# Allegro board ad-drvlv1-ebz_layout.brd
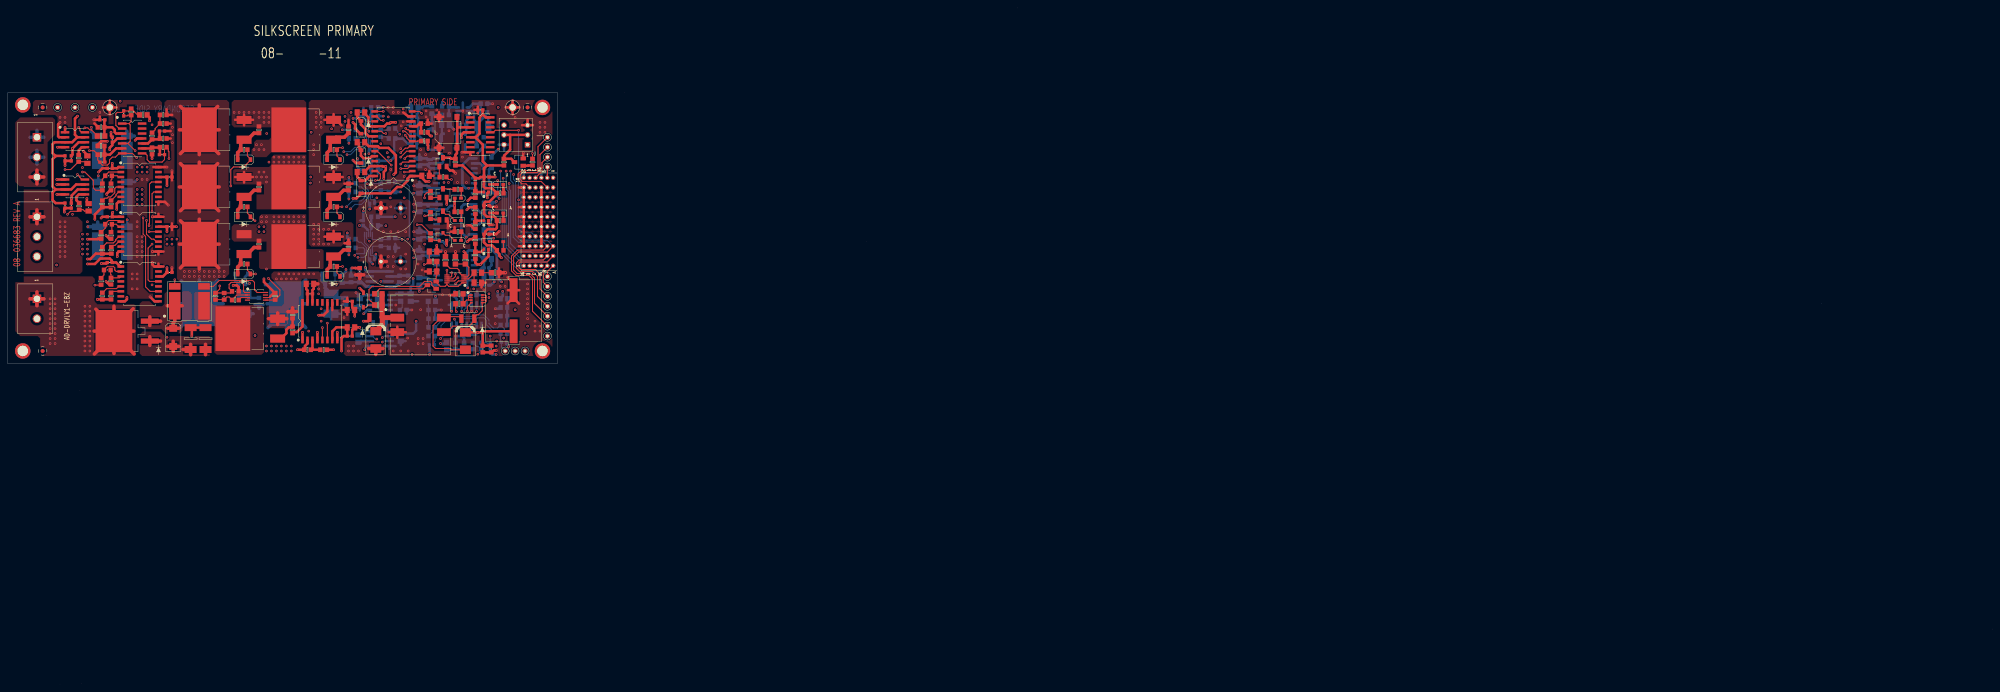
[diagram p0: board, top side]
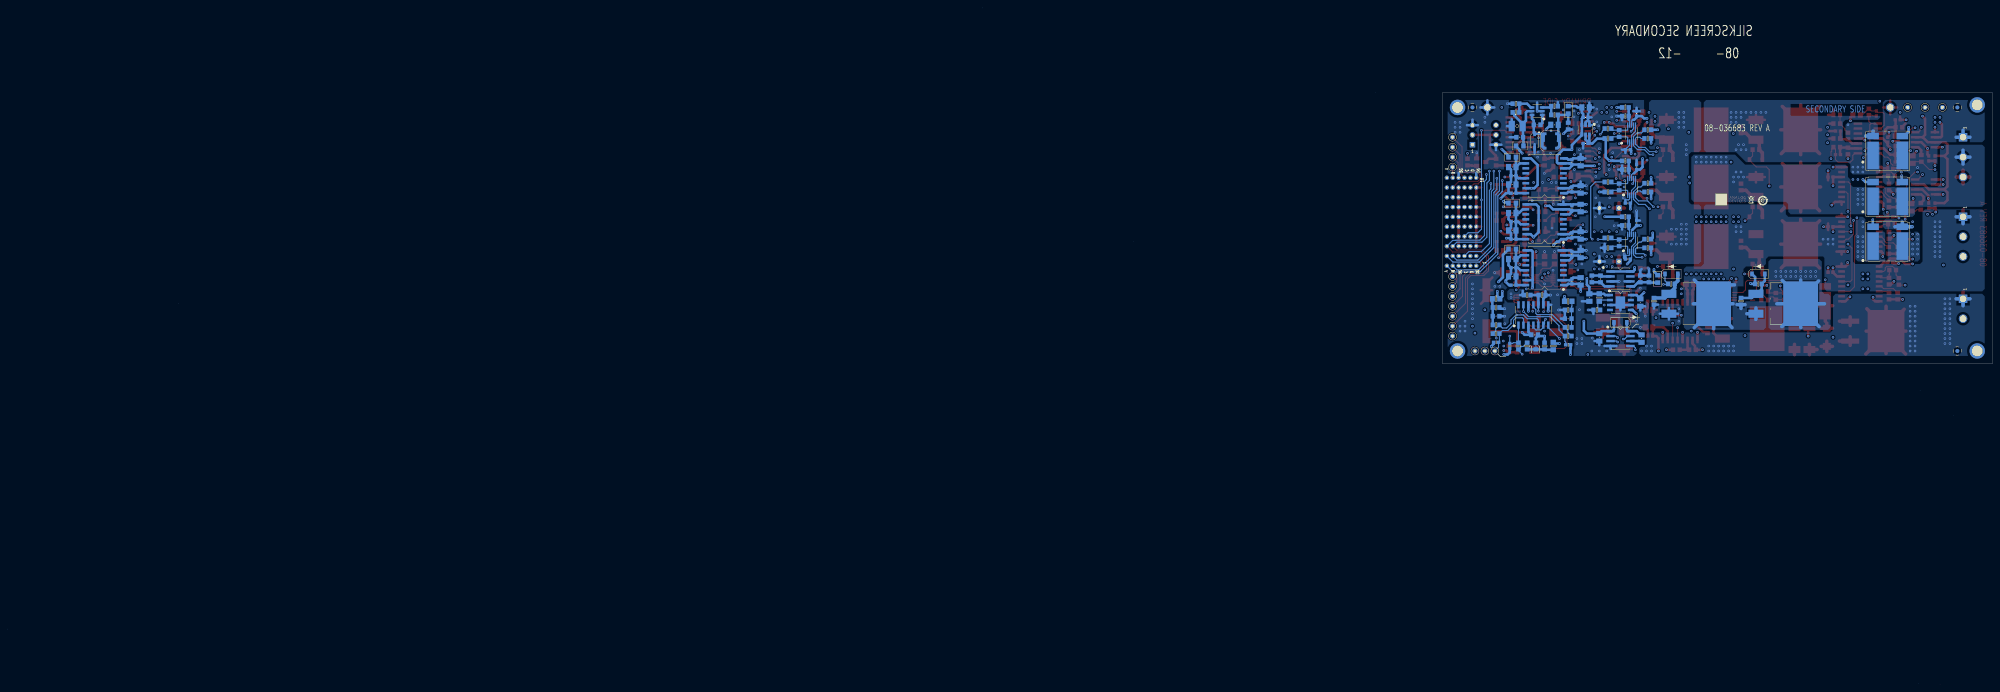
[diagram p1: board, bottom side, seen from below]

Outline 506.73 x 172.81 mm; copper layers: TOP, L2_PWR, L3_GND, L4_SIGH, L5_SIGV, L6_GND, L7_PWR, BOTTOM. Coordinates in mm from the lower left corner of the outline.
Outline path: 9.81,68.58 9.81,68.62 ; 13.32,0 13.32,0.04 ; 18.4,146.9 18.4,146.85 ; 18.42,144.15 18.42,144.19 ; 18.42,75.15 18.42,75.1 ; 18.7,0.22 18.7,0.17 ; 157.47,151.13 157.47,151.17 ; 219.2,113.16 219.2,113.2 ; 257.81,172.81 257.81,172.76 ; 463.23,97.24 463.23,97.2 ; 506.73,14.1 506.73,14.05 ; 0,151.17 0,81.83 140.31,81.83 140.31,151.17 0,151.17

## Placement (name value [footprint] x y rotation side)
A1  AD8630ARZ  [SO14]  31.75 139.42 270 top
A2  AD8251ARMZ  [RM10]  92.08 140.69 180 bottom
A3  AD8251ARMZ  [RM10]  92.08 127.04 180 bottom
A4  AD8251ARMZ  [RM10]  92.08 112.75 180 bottom
A5  ADCMP354YKSZ  [SC70_4]  122.24 126.72 0 top
A6  ADCMP354YKSZ  [SC70_4]  122.24 119.42 0 top
A7  ADCMP354YKSZ  [SC70_4]  122.24 112.12 0 top
A8  ADP1621ARMZ  [RM10]  114.3 103.55 90 top
C1  0.1UF  [C0402]  26.67 139.11 270 top
C2  0.1uF  [C0603]  106.36 143.23 0 top
C3  0.1UF  [C0402]  39.37 135.3 0 top
C4  0.1UF  [C0402]  39.37 141.33 180 top
C5  0.1UF  [C0402]  24.13 133.39 180 top
C6  0.1UF  [C0402]  29.59 145.84 270 top
C7  1UF  [C0805]  106.68 129.9 0 top
C8  0.1UF  [C0402]  24.13 144.19 0 top
C9  1UF  [C0805]  90.17 130.85 0 top
C10  1UF  [C0805]  90.17 138.47 0 top
C11  1UF  [C0805]  90.17 146.09 0 top
C12  470uF  [CPLRAD197D492H866LD24]  95.29 107.99 0 top
C13  0.1uF  [C0603]  89.85 105.45 90 top
C14  0.1UF  [C0402]  14.61 134.34 270 top
C15  0.1UF  [C0402]  16.19 134.34 90 top
C16  10UF  [C0805]  20.32 134.03 90 top
C17  0.1UF  [C0402]  14.61 122.28 270 top
C18  0.1UF  [C0402]  16.19 122.28 90 top
C19  10UF  [C0805]  20.64 121.83 90 top
C20  22NF  [C0603]  116.52 86.4 90 bottom
C21  22NF  [C0603]  126.68 94.02 180 bottom
C22  22NF  [C0603]  108.27 93.39 0 bottom
C23  0.1uF  [C0603]  116.84 89.26 0 bottom
C24  22NF  [C0603]  95.25 140.69 270 bottom
C25  22NF  [C0603]  95.25 127.04 270 bottom
C26  22NF  [C0603]  95.25 112.75 270 bottom
C27  0.1UF  [C0402]  90.81 145.77 270 bottom
C28  0.1UF  [C0402]  93.03 136.57 180 bottom
C29  0.1UF  [C0402]  90.81 132.12 270 bottom
C30  0.1UF  [C0402]  93.03 122.91 180 bottom
C31  0.1UF  [C0402]  90.81 117.83 270 bottom
C32  0.1UF  [C0402]  93.03 108.63 180 bottom
C33  0.1UF  [C0402]  122.24 129.58 180 top
C34  0.1UF  [C0402]  122.24 122.28 180 top
C35  0.1UF  [C0402]  120.65 146.73 180 top
C36  0.01UF  [C0603]  55.25 99.1 270 top
C37  0.1uF  [C0603]  58.1 100.37 0 top
C38  TBD0603  [C0603]  120.65 139.74 0 bottom
C39  10uF  [C1210]  121.29 142.6 0 bottom
C40  1UF  [C0805]  103.82 147.36 180 bottom
C41  0.1uF  [C0603]  116.21 142.92 0 bottom
C42  10UF  [C0805]  87.63 91.16 0 top
C43  0.1UF  [C0402]  103.82 144.82 180 bottom
C44  0.1UF  [C0402]  87.31 88.94 0 top
C45  10UF  [C0805]  87.63 95.61 0 top
C46  10UF  [C0805]  111.76 142.92 0 bottom
C47  0.1UF  [C0402]  87.31 97.83 0 top
C48  TBD0603  [C0603]  108.27 142.6 270 bottom
C49  10UF  [C0805]  77.15 102.28 0 top
C50  0.1UF  [C0402]  77.15 99.74 0 top
C51  TBD0603  [C0603]  102.24 103.55 270 bottom
C52  1UF  [C0805]  89.85 97.51 270 bottom
C53  2.2uF  [C0603]  100.01 103.55 270 bottom
C54  2.2uF  [C0603]  89.85 103.55 90 bottom
C55  1UF  [C0805]  102.87 98.78 270 bottom
C56  TBD0603  [C0603]  87.63 103.55 90 bottom
C57  0.1UF  [C0402]  122.24 114.98 180 top
C58  2.2uF  [C1210H87]  93.98 93.7 180 top
C59  1UF  [C0805]  108.59 110.53 180 top
C60  12pF  [C0805]  120.02 102.59 0 top
C61  1UF  [C0805]  108.59 105.45 0 top
C62  10000pF  [C0805]  120.02 105.13 0 top
C63  2.2uF  [C1210H87]  117.48 93.39 180 top
C64  470UF  [CAPSML591W531H531]  129.16 95.42 90 top
C65  0.1UF  [C0402]  103.82 138.15 0 bottom
C66  47000pF  [C0603]  25.4 105.83 0 top
C67  47000pF  [C0603]  25.72 117.52 0 top
C68  47000pF  [C0603]  25.72 129.9 0 top
C69  0.1UF  [C0402]  26.04 107.74 180 top
C70  0.1UF  [C0402]  26.04 119.42 180 top
C71  0.1UF  [C0402]  26.04 131.8 180 top
C72  0.1UF  [C0402]  41.28 105.2 0 top
C73  0.1UF  [C0402]  41.28 116.88 0 top
C74  0.1UF  [C0402]  41.28 129.58 0 top
C75  0.1UF  [C0402]  107.31 102.91 90 bottom
C76  0.1UF  [C0402]  107.31 114.66 90 bottom
C77  0.1UF  [C0402]  107.31 126.41 90 bottom
C78  10UF  [C0805]  105.09 102.91 90 bottom
C79  10UF  [C0805]  105.09 114.66 90 bottom
C80  10UF  [C0805]  105.09 126.41 90 bottom
C81  0.1UF  [C0402]  107.31 109.9 90 bottom
C82  0.1UF  [C0402]  107.31 121.64 90 bottom
C83  0.1UF  [C0402]  107.31 133.39 90 bottom
C84  10UF  [C0805]  105.09 109.9 90 bottom
C85  10UF  [C0805]  105.09 121.64 90 bottom
C86  10UF  [C0805]  105.09 133.39 90 bottom
C87  0.1UF  [C0402]  122.24 101.96 0 bottom
C88  0.1UF  [C0402]  122.24 113.71 0 bottom
C89  0.1UF  [C0402]  122.24 125.45 0 bottom
C90  10UF  [C0805]  122.56 104.18 0 bottom
C91  10UF  [C0805]  122.56 115.93 0 bottom
C92  10UF  [C0805]  122.56 127.68 0 bottom
C93  0.1UF  [C0402]  122.24 106.4 0 bottom
C94  0.1UF  [C0402]  122.24 118.15 0 bottom
C95  0.1UF  [C0402]  122.24 129.9 0 bottom
C96  10UF  [C0805]  122.56 108.63 0 bottom
C97  10UF  [C0805]  122.56 120.37 0 bottom
C98  10UF  [C0805]  122.56 132.12 0 bottom
C99  TBD0603  [C0603]  121.29 85.64 270 top
C100  TBD0603  [C0603]  123.44 85.64 270 top
C101  1UF  [C0805]  100.33 88.62 90 bottom
C102  1UF  [C0805]  89.53 88.31 90 bottom
C103  470uF  [CPLRAD197D492H866LD24]  95.29 121.64 0 top
CR1  1SMB5927BT3G  [DO214AA]  42.23 88.62 270 top
CR2  DDZ9688-7  [SOD123-3]  90.81 98.15 90 top
D1  1N4148W-7-F  [SOD123-2]  90.17 127.04 270 top
D2  1N4148W-7-F  [SOD123-2]  90.17 134.79 270 top
D3  1N4148W-7-F  [SOD123-2]  90.17 142.28 270 top
D4  1N4148W-7-F  [SOD123-2]  60.33 134.03 180 top
D5  1N4148W-7-F  [SOD123-2]  83.19 134.03 180 top
D6  1N4148W-7-F  [SOD123-2]  60.33 119.42 180 top
D7  1N4148W-7-F  [SOD123-2]  83.19 119.42 180 top
D8  1N4148W-7-F  [SOD123-2]  60.33 104.82 180 top
D9  1N4148W-7-F  [SOD123-2]  83.19 104.18 180 top
D10  1N5819HW-7-F  [SOD123-3]  116.84 138.79 270 bottom
D11  MBRS190T3G  [SMB]  116.84 87.67 270 top
D12  MBRS190T3G  [SMB]  93.98 87.99 270 top
D13  1N4148W-7-F  [SOD123-2]  59.69 104.82 180 bottom
D14  1N4148W-7-F  [SOD123-2]  81.92 104.82 180 bottom
D15  1N4148W-7-F  [SOD123-2]  94.93 92.43 0 bottom
DS1  SML-310MTT86  [LED0603]  125.73 127.68 0 top
DS2  SML-310MTT86  [LED0603]  125.73 120.37 0 top
DS3  SML-310LTT86  [LED0603]  114.94 124.18 180 top
DS4  SML-310LTT86  [LED0603]  114.94 113.39 180 top
DS5  SML-310MTT86  [LED0603]  114.94 118.47 0 top
DS6  SML-310MTT86  [LED0603]  125.73 113.07 0 top
E1  330NH  [L0805]  120.65 137.52 180 bottom
E2  330NH  [L0805]  85.41 103.55 90 bottom
E3  330NH  [L0805]  108.27 146.73 90 bottom
E4  330NH  [L0805]  122.56 111.17 0 bottom
E5  330NH  [L0805]  122.56 122.91 0 bottom
E6  330NH  [L0805]  122.56 134.66 0 bottom
L1  4.7uH  [LSMSQ154H47]  112.71 138.79 180 bottom
L2  18uH  [LSMSQ583H339]  105.41 91.8 270 top
NOREF  -  []  0 151.17 0 top
NOREF#2  -  []  153.65 148.35 0 top
NOREF#3  -  []  -0.13 81.73 0 top
NOREF#4  -  [unnamed#2]  3.82 85.14 0 top
NOREF#5  -  []  -0.08 151.25 270 top
NOREF#6  -  []  160.68 81.75 90 top
NOREF#7  -  []  -131.78 -179.03 0 top
NOREF#8  -  [unnamed#3]  8.89 85.13 0 top
NOREF#9  -  []  301.04 305.09 0 top
NOREF#10  -  []  140.31 81.83 90 top
NOREF#11  -  []  82.83 159.65 0 top
NOREF#12  -  [unnamed#2]  136.53 85.13 0 top
NOREF#13  -  []  160.6 151.87 180 top
NOREF#14  -  [unnamed#3]  132.72 147.36 0 top
NOREF#15  -  [unnamed#3]  8.89 147.36 0 top
NOREF#16  -  []  513.08 57.51 0 top
NOREF#17  -  []  -131.65 -182.2 0 top
NOREF#18  -  [unnamed#2]  3.82 148 0 top
NOREF#19  -  []  313.57 59.1 0 top
NOREF#20  -  [unnamed#2]  136.53 147.36 0 top
NOREF#21  -  [unnamed#3]  132.72 147.36 180 bottom
NOREF#22  -  [unnamed#3]  8.89 85.13 180 bottom
NOREF#23  -  []  143.53 148.07 180 bottom
NOREF#24  -  [unnamed#3]  8.89 147.36 180 bottom
NOREF#25  -  []  146.46 148.23 180 bottom
P1  691311500103  [CNHDR1X3H480]  7.44 139.74 270 top
P2  6469169-1  [CNTYCO1469169-1]  139.25 106.9 90 top
P4  691311500102  [CNHDR1X2H480]  7.44 98.47 270 top
P5  691311500103  [CNHDR1X3H480]  7.44 119.42 270 top
Q1  SI2319DS-T1-E3  [SOT23-M3]  111.12 114.34 0 top
Q2  IRFS3806PBF  [D2PAK]  53.34 141.65 90 top
Q3  IRFS3806PBF  [D2PAK]  76.2 141.65 90 top
Q4  IRFS3806PBF  [D2PAK]  53.34 127.04 90 top
Q5  IRFS3806PBF  [D2PAK]  76.2 127.04 90 top
Q6  IRFS3806PBF  [D2PAK]  53.34 112.44 90 top
Q7  IRFS3806PBF  [D2PAK]  76.2 111.8 90 top
Q8  SPB80P06P G  [PG-TO263-3]  30.48 90.21 90 top
Q9  IRFS3006TRLPBF  [D2PAK]  61.91 90.85 90 top
Q10  BSS138TA  [SOT23]  111.12 125.45 0 top
Q11  BSS138TA  [SOT23]  111.12 119.74 0 top
Q12  BSS138TA  [SOT23]  130.49 133.39 90 top
Q14  BSS138TA  [SOT23]  111.12 133.39 0 top
Q15  MMBTA06-7-F  [SOT23]  108.27 101.96 90 top
Q16  FDMC86106LZ  [MLP8_3_3X3_3]  119.76 98.47 270 top
Q17  IRFS3806PBF  [D2PAK]  53.34 97.2 270 bottom
Q18  IRFS3806PBF  [D2PAK]  75.56 97.2 270 bottom
R1  0.005  [R3637]  26.67 113.07 180 bottom
R2  0.006  [R3637]  26.67 136.25 180 bottom
R3  0.006  [R3637]  26.67 124.5 180 bottom
R4  0.005  [R3637]  46.36 97.83 0 top
R5  22  [R0603]  107.95 125.14 270 top
R6  220  [R0603]  114.94 126.41 180 top
R7  220  [R0603]  114.94 115.61 180 top
R8  22  [R0603]  107.95 114.34 90 top
R9  22  [R0603]  107.95 119.74 270 top
R10  220  [R0603]  114.94 120.69 0 top
R11  110K  [R0603]  39.69 145.46 180 top
R12  20K  [R0603]  39.69 143.23 0 top
R13  10K  [R0603]  36.83 140.06 270 top
R14  10K  [R0603]  36.83 136.25 90 top
R15  10K  [R0603]  106.36 138.79 180 top
R16  1MEG  [R0603]  106.36 141.01 180 top
R17  10K  [R0603]  39.69 139.42 0 top
R18  10K  [R0603]  39.69 137.2 0 top
R19  10K  [R0603]  31.5 146.22 90 top
R20  35.7K  [R0603]  23.81 135.3 0 top
R21  10K  [R0603]  23.81 142.28 180 top
R22  2K  [R0805]  23.81 140.06 180 top
R23  2K  [R0805]  34.61 145.46 0 top
R24  3.65K  [R0603]  23.81 137.52 180 top
R25  22  [R0603]  60.33 136.57 180 top
R26  22  [R0603]  83.19 136.57 180 top
R27  10K  [R0603]  64.14 141.65 90 top
R28  10K  [R0603]  87 141.65 90 top
R29  22  [R0603]  18.1 134.34 270 top
R30  22  [R0603]  60.33 121.96 180 top
R31  22  [R0603]  83.19 121.96 180 top
R32  10K  [R0603]  64.14 127.04 90 top
R33  10K  [R0603]  87 127.04 90 top
R34  22  [R0603]  18.22 122.09 270 top
R35  22  [R0603]  60.33 107.36 180 top
R36  22  [R0603]  83.19 106.72 180 top
R37  10K  [R0603]  64.14 112.44 90 top
R38  10K  [R0603]  87 111.8 90 top
R39  102K  [R0603]  118.75 99.42 180 bottom
R40  25.5K  [R0603]  114.94 99.42 180 bottom
R41  34.8K  [R0805]  112.08 86.4 270 bottom
R42  23.2K  [R0603]  114.3 86.4 90 bottom
R43  34.8K  [R0805]  126.68 98.47 0 bottom
R44  23.2K  [R0603]  126.68 96.24 180 bottom
R45  34.8K  [R0805]  108.27 97.83 180 bottom
R46  23.2K  [R0603]  108.27 95.61 0 bottom
R47  10K  [R0603]  118.75 86.4 90 bottom
R48  10K  [R0603]  126.68 91.8 180 bottom
R49  10K  [R0603]  108.27 91.16 0 bottom
R50  1MEG  [R0603]  120.97 86.4 90 bottom
R51  1MEG  [R0603]  126.68 89.58 180 bottom
R52  1MEG  [R0603]  108.27 88.94 0 bottom
R53  30K  [R0402]  123.19 86.4 90 bottom
R54  30K  [R0402]  126.68 87.35 180 bottom
R55  30K  [R0402]  108.27 86.72 0 bottom
R56  8.25  [R0603]  98.11 141.96 180 bottom
R57  8.25  [R0603]  98.11 128.31 180 bottom
R58  8.25  [R0603]  98.11 114.02 180 bottom
R59  8.25  [R0603]  98.11 139.42 180 bottom
R60  8.25  [R0603]  98.11 125.77 180 bottom
R61  8.25  [R0603]  98.11 111.48 180 bottom
R62  10K  [R0603]  87.95 139.42 180 bottom
R63  10K  [R0603]  87.95 125.77 180 bottom
R64  10K  [R0603]  87.95 111.48 180 bottom
R65  10K  [R0603]  87.95 141.65 180 bottom
R66  10K  [R0603]  87.95 127.99 180 bottom
R67  10K  [R0603]  87.95 113.71 180 bottom
R68  0  [R0603]  93.66 145.14 0 bottom
R69  0  [R0603]  93.66 131.49 0 bottom
R70  0  [R0603]  93.66 117.2 0 bottom
R71  0  [R0603]  93.66 147.36 0 bottom
R72  0  [R0603]  93.66 133.71 0 bottom
R73  0  [R0603]  93.66 119.42 0 bottom
R74  68.1K  [R0402]  119.38 128.63 270 top
R75  10K  [R0603]  119.38 125.14 270 top
R76  180K  [R0603]  119.38 121.01 270 top
R77  10K  [R0603]  119.38 117.2 270 top
R78  220  [R0603]  125.73 125.45 0 top
R79  180K  [R0603]  119.38 113.39 270 top
R80  22  [R0603]  133.99 133.39 270 top
R81  10K  [R0603]  126.68 133.39 90 top
R82  2K  [R2512]  46.67 88.31 90 top
R83  2K  [R2512]  50.48 88.31 90 top
R84  9.09K  [R0603]  53.02 99.1 270 top
R85  191K  [R0603]  58.1 98.15 0 top
R86  22  [R0603]  72.71 90.53 90 top
R87  100K  [R0603]  72.71 94.34 90 top
R88  4.99K  [R0603]  68.26 99.1 90 top
R89  715K  [R0603]  121.6 146.09 180 bottom
R90  100K  [R0603]  121.6 148.31 0 bottom
R91  10K  [R0603]  111.76 147.68 180 bottom
R92  3.65K  [R0603]  76.52 85.45 0 top
R93  3.65K  [R0603]  80.65 85.45 0 top
R94  53.6K  [R0603]  111.76 145.46 180 bottom
R95  118K  [R0805]  100.33 98.78 270 bottom
R96  24.9K  [R0603]  100.97 95.61 0 bottom
R97  10K  [R0603]  114.3 133.39 90 top
R99  10K  [R0603]  119.38 109.58 270 top
R100  22  [R0603]  111.12 129.58 180 top
R101  220  [R0603]  125.73 118.47 0 top
R102  220  [R0603]  125.73 110.85 0 top
R103  4.42K  [R0805]  114.3 108.31 270 top
R104  60.4K  [R0805]  111.76 108.31 90 top
R105  49.9K  [R0805]  116.84 108.31 90 top
R106  56.2K  [R0805]  94.62 96.88 180 top
R107  1  [R0805]  108.59 107.99 180 top
R108  750  [R0805]  94.62 99.74 180 top
R109  536K  [R0805]  124.46 105.13 0 top
R110  0.022  [R0805]  115.32 99.74 180 top
R111  649  [R0805]  115.32 97.2 180 top
R112  22  [R0603]  59.69 102.28 180 bottom
R113  22  [R0603]  81.92 102.28 180 bottom
R114  10K  [R0603]  64.14 97.83 270 bottom
R115  10K  [R0603]  86.36 97.83 270 bottom
R116  22  [R0603]  23.81 102.91 90 top
R117  22  [R0603]  26.35 102.97 90 top
R118  22  [R0603]  23.81 114.66 90 top
R119  22  [R0603]  26.35 114.66 90 top
R120  22  [R0603]  24.13 127.04 90 top
R121  22  [R0603]  26.35 127.04 90 top
R122  0  [R0603]  24.13 110.85 270 top
R123  0  [R0603]  24.13 122.72 270 top
R124  0  [R0603]  26.42 110.85 270 top
R125  0  [R0603]  24.13 99.16 270 top
R126  0  [R0603]  26.35 122.72 270 top
R127  0  [R0603]  26.35 99.16 270 top
S1  B3S1000  [SWB3S1000]  112.4 141.01 270 top
S2  PS-2206-L NS  [SWTHSQ315H555]  132.72 137.84 90 top
TP1  TESTPAD  [TPC50D30]  21.59 147.36 0 top
TP2  WHT  [CNLOOPTP]  26.04 147.36 0 top
TP3  TESTPAD  [TPC50D30]  17.15 147.36 0 top
TP4  WHT  [CNLOOPTP]  128.91 147.36 0 top
TP5  TESTPAD  [TPC50D30]  12.7 147.36 0 top
TP6  TESTPAD  [TPC50D30]  137.8 104.18 180 bottom
TP7  TESTPAD  [TPC50D30]  137.8 99.1 180 bottom
TP8  TESTPAD  [TPC50D30]  137.8 94.02 180 bottom
TP9  TESTPAD  [TPC50D30]  132.08 85.13 180 bottom
TP10  TESTPAD  [TPC50D30]  137.8 101.64 180 bottom
TP11  TESTPAD  [TPC50D30]  137.8 96.56 180 bottom
TP12  TESTPAD  [TPC50D30]  137.8 91.48 180 bottom
TP13  TESTPAD  [TPC50D30]  129.54 85.13 180 bottom
TP14  TESTPAD  [TPC50D30]  137.8 137.2 0 top
TP15  TESTPAD  [TPC50D30]  137.8 132.12 0 top
TP16  TESTPAD  [TPC50D30]  137.8 88.94 180 bottom
TP17  TESTPAD  [TPC50D30]  127 85.13 180 bottom
TP18  TESTPAD  [TPC50D30]  137.8 139.74 0 top
TP19  TESTPAD  [TPC50D30]  137.8 134.66 0 top
U1  IRS2336DSTRPBF  [SO28WB]  98.48 138.09 90 top
U2  AD8207WBRZ  [SO8]  17.15 139.11 270 top
U3  AD8207WBRZ  [SO8]  17.15 127.04 270 top
U4  HEF4044BT,653  [SO16]  120.65 140.38 270 top
U5  CMP04FSZ  [SO14NB-2]  117.16 94.34 180 bottom
U6  AD8214ARMZ  [MSOP8]  63.5 99.1 270 top
U7  ADP2301AUJZ  [TSOT23_6]  116.21 146.41 90 bottom
U8  ADR3425ARJZ  [SOT23_6-2]  103.82 141.65 0 bottom
U9  ADUM5230ARWZ  [SO16WB]  79.69 92.75 0 top
U10  ADP7102ARDZ  [SO8NB-PAD3_1X2_41]  94.93 97.51 270 bottom
U11  ADM660ARZ  [SO8]  94.93 103.55 270 bottom
U12  AD7401AYRWZ  [SO16WB]  33.66 102.28 270 top
U13  AD7401AYRWZ  [SO16WB]  33.66 114.98 270 top
U14  AD7401AYRWZ  [SO16WB]  33.66 127.68 270 top
U15  ADUM5000ARWZ  [SO16WB]  114.3 106.4 90 bottom
U16  ADUM5000ARWZ  [SO16WB]  114.3 118.15 90 bottom
U17  ADUM5000ARWZ  [SO16WB]  114.3 129.9 90 bottom
U18  IR2108SPBF  [SO8]  94.93 88.31 270 bottom

## Library data of the parts
A1 = AD713N: User Part Number: UPN; part number: AD713N_SM-AD8630ARZ,E006061,SO14,N/A
A2-A4 = AD8251: User Part Number: UPN; part number: AD8251_SM-AD8251ARMZ,E019018,RM10,N/A
A5-A7 = ADCMP35X: User Part Number: UPN; part number: ADCMP35X_SM-ADCMP354YKSZ,E013345,SC70_4,N/A
A8 = ADP1621: User Part Number: UPN; part number: ADP1621_SM-ADP1621ARMZ,E005374,RM10,N/A
C1 C3-C6 C8 C14 C15 C17 C18 C27-C35 C43 C44 C47 C50 C57 C65 C69-C77 C81-C83 C87-C89 C93-C95 = CAP: Tolerance: 10; User Part Number: UPN; alternate symbols: (C0402H22_ALT,C0201-2,C0402_A); part number: CAP_SM-0.1UF,16V,10,E007200,C0402; tolerance: 10
C2 C13 C23 C37 C41 = CAP: Tolerance: 10; User Part Number: UPN; alternate symbols: (C0402H22_ALT,C0201-2,C0402_A); part number: CAP_SM-0.1UF,100V,10,E013624,C0603; tolerance: 10
C7 C9-C11 C40 C52 C55 C59 C61 C101 C102 = CAP: Tolerance: 10; User Part Number: UPN; alternate symbols: (C0402H22_ALT,C0201-2,C0402_A); part number: CAP_SM-1UF,50V,10,E007202,C0805; tolerance: 10
C12 C103 = CAPP: User Part Number: UPN; Tolerance: 20; part number: CAPP_TH-470UF,63V,20,E016987,CPLRAD197D492H866LD24; tolerance: 20
C16 C19 C42 C45 C46 C49 C78-C80 C84-C86 C90-C92 C96-C98 = CAP: Tolerance: 10; User Part Number: UPN; alternate symbols: (C0402H22_ALT,C0201-2,C0402_A); part number: CAP_SM-10UF,16V,10,E006166,C0805; tolerance: 10
C20-C22 C24-C26 = CAP: Tolerance: 10; User Part Number: UPN; alternate symbols: (C0402H22_ALT,C0201-2,C0402_A); part number: CAP_SM-22NF,16V,10,E000327,C0603; tolerance: 10
C36 = CAP: Tolerance: 10; User Part Number: UPN; alternate symbols: (C0402H22_ALT,C0201-2,C0402_A); part number: CAP_SM-0.01UF,50V,10,E000421,C0603; tolerance: 10
C38 C48 C51 C56 C99 C100 = CAP: User Part Number: UPN; alternate symbols: (C0402H22_ALT,C0201-2,C0402_A); part number: CAP_SM-TBD0603,TBD0603,TBD0603,E000382,C0603
C39 = CAP: Tolerance: 10; User Part Number: UPN; alternate symbols: (C0402H22_ALT,C0201-2,C0402_A); part number: CAP_SM-10UF,25V,10,E011786,C1210; tolerance: 10
C53 C54 = CAP: Tolerance: 10; User Part Number: UPN; alternate symbols: (C0402H22_ALT,C0201-2,C0402_A); part number: CAP_SM-2.2UF,10V,10,E010426,C0603; tolerance: 10
C58 C63 = CAP: Tolerance: 10; User Part Number: UPN; alternate symbols: (C0402H22_ALT,C0201-2,C0402_A); part number: CAP_SM-2.2UF,100V,10,E015185,C1210H87; tolerance: 10
C60 = CAP: Tolerance: 5; User Part Number: UPN; alternate symbols: (C0402H22_ALT,C0201-2,C0402_A); part number: CAP_SM-12PF,50V,5,E012688,C0805; tolerance: 5
C62 = CAP: Tolerance: 10; User Part Number: UPN; alternate symbols: (C0402H22_ALT,C0201-2,C0402_A); part number: CAP_SM-10000PF,250V,10,E011672,C0805; tolerance: 10
C64 = CAPP: Tolerance: 20; User Part Number: UPN; part number: CAPP_SM-470UF,35V,20,E006570,CAPSML591W531H531; tolerance: 20
C66-C68 = CAP: Tolerance: 5; User Part Number: UPN; alternate symbols: (C0402H22_ALT,C0201-2,C0402_A); part number: CAP_SM-47000PF,25V,5,E012692,C0603; tolerance: 5
CR1 = DIOZNR: User Part Number: UPN; Tolerance: N/A; part number: DIOZNR_SM-1SMB5927BT3G,12V,N/A,E006923,DO214AA; tolerance: N/A
CR2 = DIOZNR: Tolerance: 5; User Part Number: UPN; part number: DIOZNR_SM-DDZ9688-7,4.7V,5,E019172,SOD123-3; tolerance: 5
D1-D9 D13-D15 = DIO: User Part Number: UPN; Tolerance: N/A; part number: DIO_SM-1N4148W-7-F,100V,N/A,E018902,SOD123-2; tolerance: N/A
D10 = DIOSCHOTTKY: Tolerance: N/A; User Part Number: UPN; part number: DIOSCHOTTKY_SM-1N5819HW-7-F,40V,N/A,E014276,SOD123-3; tolerance: N/A
D11 D12 = DIOSCHOTTKY: User Part Number: UPN; Tolerance: N/A; part number: DIOSCHOTTKY_SM-MBRS190T3G,90V,N/A,E019177,SMB; tolerance: N/A
DS1 DS2 DS5 DS6 = DIOLED: Tolerance: N/A; User Part Number: UPN; part number: DIOLED_SM-SML-310MTT86,2.8V,N/A,E001179,LED0603; tolerance: N/A
DS3 DS4 = DIOLED: Tolerance: N/A; User Part Number: UPN; part number: DIOLED_SM-SML-310LTT86,2.5V,N/A,E001178,LED0603; tolerance: N/A
E1-E6 = FERRITE: Tolerance: 5; User Part Number: UPN; part number: FERRITE_SM-330NH,5,E002351,L0805; tolerance: 5
L1 = IND: Tolerance: 20; User Part Number: UPN; alternate symbols: (L0402-2,L0603_ALT); part number: IND_SM-4.7UH,20,E017961,LSMSQ154H47; tolerance: 20
L2 = IND_4P_V4: Tolerance: 20; User Part Number: UPN; part number: IND_4P_V4_SM-18UH,20,E019170,LSMSQ583H339; tolerance: 20
P1 P5 = CN3P: User Part Number: UPN; part number: CN3P_TH-691311500103,E019197,CNHDR1X3H480
P2 = CNTYCO60P: User Part Number: UPN; part number: CNTYCO60P_TH-6469169-1,E006097,CNTYCO1469169-1
P4 = CN2P: User Part Number: UPN; part number: CN2P_TH-691311500102,E019196,CNHDR1X2H480
Q1 = TRANSI2301DS: User Part Number: UPN; part number: TRANSI2301DS_SM-SI2319DS-T1-E3,E017810,SOT23-M3
Q2-Q7 Q17 Q18 = TRANNMOSFET_V18: User Part Number: UPN; part number: TRANNMOSFET_V18_SM-IRFS3806PBF,E019009,D2PAK
Q8 = TRANPMOSFET_V11: User Part Number: UPN; part number: TRANPMOSFET_V11_SM-SPB80P06P G,E019087,PG-TO263-3
Q9 = TRANNMOSFET_V18: User Part Number: UPN; part number: TRANNMOSFET_V18_SM-IRFS3006TRLPBF,E019017,D2PAK
Q10-Q12 Q14 = TRANBSS138: User Part Number: UPN; part number: TRANBSS138_SM-BSS138TA,E004635,SOT23
Q15 = TRANNPN_V2: User Part Number: UPN; part number: TRANNPN_V2_SM-MMBTA06-7-F,E019171,SOT23
Q16 = TRANNMOSFET_V9: User Part Number: UPN; Tolerance: 100V; part number: TRANNMOSFET_V9_SM-FDMC86106LZ,E017648,MLP8_3_3X3_3; tolerance: 100V
R1 R4 = RES4PKEL: Tolerance: 1; User Part Number: UPN; alternate symbols: (TO220-4); part number: RES4PKEL_SM-0.005,3W,1,E019084,R3637; tolerance: 1
R2 R3 = RES4PKEL: Tolerance: 1; User Part Number: UPN; alternate symbols: (TO220-4); part number: RES4PKEL_SM-0.006,3W,1,E019127,R3637; tolerance: 1
R5 R8 R9 R25 R26 R29-R31 R34-R36 R80 R86 R100 R112 R113 R116-R121 = RES: Tolerance: 1; User Part Number: UPN; alternate symbols: (RRAD984L1500W75H520LD32;TO220H590_ALT;R0402_A); part number: RES_SM-22,1/16W,1,E004223,R0603; tolerance: 1
R6 R7 R10 R78 R101 R102 = RES: Tolerance: 1; User Part Number: UPN; alternate symbols: (RRAD984L1500W75H520LD32;TO220H590_ALT;R0402_A); part number: RES_SM-220,1/16W,1,E004222,R0603; tolerance: 1
R11 = RES: Tolerance: 1; User Part Number: UPN; alternate symbols: (RRAD984L1500W75H520LD32;TO220H590_ALT;R0402_A); part number: RES_SM-110K,1/10W,1,E014719,R0603; tolerance: 1
R12 = RES: Tolerance: 1; User Part Number: UPN; alternate symbols: (RRAD984L1500W75H520LD32;TO220H590_ALT;R0402_A); part number: RES_SM-20K,1/10W,1,E017927,R0603; tolerance: 1
R13-R15 R17 R18 R27 R28 R32 R33 R37 R38 R47-R49 R62-R67 R75 R77 R81 R91 R97 R99 R114 R115 = RES: Tolerance: 1; User Part Number: UPN; alternate symbols: (RRAD984L1500W75H520LD32;TO220H590_ALT;R0402_A); part number: RES_SM-10K,1/10W,1,E003671,R0603; tolerance: 1
R16 R50-R52 = RES: Tolerance: 1; User Part Number: UPN; alternate symbols: (RRAD984L1500W75H520LD32;TO220H590_ALT;R0402_A); part number: RES_SM-1MEG,1/10W,1,E003682,R0603; tolerance: 1
R19 R21 = RES: Tolerance: 0.1; User Part Number: UPN; alternate symbols: (RRAD984L1500W75H520LD32;TO220H590_ALT;R0402_A); part number: RES_SM-10K,1/16W,0.1,E003965,R0603; tolerance: 0.1
R20 = RES: Tolerance: 1; User Part Number: UPN; alternate symbols: (RRAD984L1500W75H520LD32;TO220H590_ALT;R0402_A); part number: RES_SM-35.7K,1/10W,1,E016592,R0603; tolerance: 1
R22 R23 = RES: Tolerance: 0.1; User Part Number: UPN; alternate symbols: (RRAD984L1500W75H520LD32;TO220H590_ALT;R0402_A); part number: RES_SM-2K,1/8W,0.1,E016846,R0805; tolerance: 0.1
R24 R92 R93 = RES: Tolerance: 1; User Part Number: UPN; alternate symbols: (RRAD984L1500W75H520LD32;TO220H590_ALT;R0402_A); part number: RES_SM-3.65K,1/10W,1,E003679,R0603; tolerance: 1
R39 = RES: Tolerance: 1; User Part Number: UPN; alternate symbols: (RRAD984L1500W75H520LD32;TO220H590_ALT;R0402_A); part number: RES_SM-102K,1/10W,1,E014965,R0603; tolerance: 1
R40 = RES: Tolerance: 1; User Part Number: UPN; alternate symbols: (RRAD984L1500W75H520LD32;TO220H590_ALT;R0402_A); part number: RES_SM-25.5K,1/10W,1,E011039,R0603; tolerance: 1
R41 R43 R45 = RES: Tolerance: 0.1; User Part Number: UPN; alternate symbols: (RRAD984L1500W75H520LD32;TO220H590_ALT;R0402_A); part number: RES_SM-34.8K,1/10W,0.1,E010465,R0805; tolerance: 0.1
R42 R44 R46 = RES: Tolerance: 1; User Part Number: UPN; alternate symbols: (RRAD984L1500W75H520LD32;TO220H590_ALT;R0402_A); part number: RES_SM-23.2K,1/10W,1,E013527,R0603; tolerance: 1
R53-R55 = RES: Tolerance: 1; User Part Number: UPN; alternate symbols: (RRAD984L1500W75H520LD32;TO220H590_ALT;R0402_A); part number: RES_SM-30K,1/16W,1,E003792,R0402; tolerance: 1
R56-R61 = RES: Tolerance: 1; User Part Number: UPN; alternate symbols: (RRAD984L1500W75H520LD32;TO220H590_ALT;R0402_A); part number: RES_SM-8.25,1/16W,1,E019135,R0603; tolerance: 1
R68-R73 R122-R127 = RES: Tolerance: 5; User Part Number: UPN; alternate symbols: (RRAD984L1500W75H520LD32;TO220H590_ALT;R0402_A); part number: RES_SM-0,1/10W,5,E006826,R0603; tolerance: 5
R74 = RES: Tolerance: 1; User Part Number: UPN; alternate symbols: (RRAD984L1500W75H520LD32;TO220H590_ALT;R0402_A); part number: RES_SM-68.1K,1/10W,1,E014436,R0402; tolerance: 1
R76 R79 = RES: Tolerance: 1; User Part Number: UPN; alternate symbols: (RRAD984L1500W75H520LD32;TO220H590_ALT;R0402_A); part number: RES_SM-180K,1/10W,1,E013305,R0603; tolerance: 1
R82 R83 = RES: Tolerance: 1; User Part Number: UPN; alternate symbols: (RRAD984L1500W75H520LD32;TO220H590_ALT;R0402_A); part number: RES_SM-2K,1W,1,E016447,R2512; tolerance: 1
R84 = RES: Tolerance: 1; User Part Number: UPN; alternate symbols: (RRAD984L1500W75H520LD32;TO220H590_ALT;R0402_A); part number: RES_SM-9.09K,1/10W,1,E003703,R0603; tolerance: 1
R85 = RES: Tolerance: 1; User Part Number: UPN; alternate symbols: (RRAD984L1500W75H520LD32;TO220H590_ALT;R0402_A); part number: RES_SM-191K,1/10W,1,E018406,R0603; tolerance: 1
R87 R90 = RES: Tolerance: 1; User Part Number: UPN; alternate symbols: (RRAD984L1500W75H520LD32;TO220H590_ALT;R0402_A); part number: RES_SM-100K,1/10W,1,E010279,R0603; tolerance: 1
R88 = RES: Tolerance: 1; User Part Number: UPN; alternate symbols: (RRAD984L1500W75H520LD32;TO220H590_ALT;R0402_A); part number: RES_SM-4.99K,1/10W,1,E003726,R0603; tolerance: 1
R89 = RES: Tolerance: 1; User Part Number: UPN; alternate symbols: (RRAD984L1500W75H520LD32;TO220H590_ALT;R0402_A); part number: RES_SM-715K,1/10W,1,E019109,R0603; tolerance: 1
R94 = RES: Tolerance: 0.1; User Part Number: UPN; alternate symbols: (RRAD984L1500W75H520LD32;TO220H590_ALT;R0402_A); part number: RES_SM-53.6K,1/10W,0.1,E018889,R0603; tolerance: 0.1
R95 = RES: Tolerance: 1; User Part Number: UPN; alternate symbols: (RRAD984L1500W75H520LD32;TO220H590_ALT;R0402_A); part number: RES_SM-118K,1/8W,1,E014053,R0805; tolerance: 1
R96 = RES: Tolerance: 0.5; User Part Number: UPN; alternate symbols: (RRAD984L1500W75H520LD32;TO220H590_ALT;R0402_A); part number: RES_SM-24.9K,1/16W,0.5,E011717,R0603; tolerance: 0.5
R103 = RES: Tolerance: 1; User Part Number: UPN; alternate symbols: (RRAD984L1500W75H520LD32;TO220H590_ALT;R0402_A); part number: RES_SM-4.42K,1/8W,1,E003580,R0805; tolerance: 1
R104 = RES: Tolerance: 1; User Part Number: UPN; alternate symbols: (RRAD984L1500W75H520LD32;TO220H590_ALT;R0402_A); part number: RES_SM-60.4K,1/8W,1,E003582,R0805; tolerance: 1
R105 = RES: Tolerance: 1; User Part Number: UPN; alternate symbols: (RRAD984L1500W75H520LD32;TO220H590_ALT;R0402_A); part number: RES_SM-49.9K,1/8W,1,E003486,R0805; tolerance: 1
R106 = RES: Tolerance: 1; User Part Number: UPN; alternate symbols: (RRAD984L1500W75H520LD32;TO220H590_ALT;R0402_A); part number: RES_SM-56.2K,1/8W,1,E014917,R0805; tolerance: 1
R107 = RES: User Part Number: UPN; alternate symbols: (RRAD984L1500W75H520LD32;TO220H590_ALT;R0402_A); part number: RES_SM-1,1/10W,1,E003556,R0805
R108 = RES: Tolerance: 1; User Part Number: UPN; alternate symbols: (RRAD984L1500W75H520LD32;TO220H590_ALT;R0402_A); part number: RES_SM-750,1/8W,1,E003489,R0805; tolerance: 1
R109 = RES: Tolerance: 1; User Part Number: UPN; alternate symbols: (RRAD984L1500W75H520LD32;TO220H590_ALT;R0402_A); part number: RES_SM-536K,1/8W,1,E003548,R0805; tolerance: 1
R110 = RES: Tolerance: 1; User Part Number: UPN; alternate symbols: (RRAD984L1500W75H520LD32;TO220H590_ALT;R0402_A); part number: RES_SM-0.022,1/4W,1,E006394,R0805; tolerance: 1
R111 = RES: Tolerance: 1; User Part Number: UPN; alternate symbols: (RRAD984L1500W75H520LD32;TO220H590_ALT;R0402_A); part number: RES_SM-649,1/8W,1,E003634,R0805; tolerance: 1
S1 = SWSPST4PIN: User Part Number: UPN; part number: SWSPST4PIN_SM-B3S1000,E004572,SWB3S1000
S2 = SWDPDT_V6: User Part Number: UPN; part number: SWDPDT_V6_TH-PS-2206-L NS,E019143,SWTHSQ315H555
TP1 TP3 TP5-TP19 = NCTESTPAD: User Part Number: UPN; part number: NCTESTPAD_TH-TESTPAD,E007450,TPC50D30
TP2 TP4 = CNTP1P: User Part Number: UPN; alternate symbols: (CNBANANA_ALT); part number: CNTP1P_TH-WHT,E000946,CNLOOPTP
U1 = ICIRS2336D: User Part Number: UPN; part number: ICIRS2336D_SM-IRS2336DSTRPBF,E019006,SO28WB
U2 U3 = AD8207: User Part Number: UPN; part number: AD8207_SM-AD8207WBRZ,E018999,SO8,N/A
U4 = ICHEF4044B: User Part Number: UPN; part number: ICHEF4044B_SM-HEF4044BT,653,E019110,SO16
U5 = CMP04: User Part Number: UPN; part number: CMP04_SM-CMP04FSZ,E018278,SO14NB-2,N/A
U6 = AD8214: User Part Number: UPN; part number: AD8214_SM-AD8214ARMZ,E018997,MSOP8,N/A
U7 = ADP2301: User Part Number: UPN; part number: ADP2301_SM-ADP2301AUJZ,E007310,TSOT23_6,N/A
U8 = ADR34XX: User Part Number: UPN; part number: ADR34XX_SM-ADR3425ARJZ,E014189,SOT23_6-2,N/A
U9 = ADUM5230: User Part Number: UPN; part number: ADUM5230_SM-ADUM5230ARWZ,E019024,SO16WB,N/A
U10 = ADP7102: User Part Number: UPN; part number: ADP7102_SM-ADP7102ARDZ,E017712,SO8NB-PAD3_1X2_41,N/A
U11 = ADM660: User Part Number: UPN; part number: ADM660_TH-ADM660ARZ,E006022,SO8,N/A
U12-U14 = AD7401: User Part Number: UPN; part number: AD7401_SM-AD7401AYRWZ,E017532,SO16WB,N/A
U15-U17 = ADUM5000: User Part Number: UPN; part number: ADUM5000_SM-ADUM5000ARWZ,E018875,SO16WB,N/A
U18 = ICIR2108: User Part Number: UPN; part number: ICIR2108_SM-IR2108SPBF,E019253,SO8

## Footprints (pads in the part's own frame, mm; a bottom-side part is the same pattern mirrored in y, then rotated)
C0402
  rect 0.889x0.813 smd: 1(-0.635,0) 2(0.635,0)
C0603
  rect 1.092x1.194 smd: 1(-0.851,0) 2(0.851,0)
C0805
  rect 1.295x1.6 smd: 1(-0.953,0) 2(0.953,0)
C1210
  rect 1.575x2.692 smd: 1(-1.397,0) 2(1.397,0)
C1210H87
  rect 1.092x2.21 smd: 1(-1.646,0) 2(1.646,0)
CAPSML591W531H531
  rect 6.096x2.032 smd: N(5.248,0) P(-5.248,0)
CNHDR1X2H480
  rect 2.159x2.159 hole 1.651: 1(0,0)
  round 2.159 hole 1.651: 2(5.08,0)
CNHDR1X3H480
  rect 2.159x2.159 hole 1.651: 1(0,0)
  round 2.159 hole 1.651: 2(5.08,0) 3(10.16,0)
CNLOOPTP
  round 2.159 hole 1.6: 1(0,0)
CNTYCO1469169-1
  round 1.118 hole 0.61: A1(0,0) A2(2.5,0) A3(5,0) A4(7.5,0) A5(10,0) A6(12.5,0) A7(15,0) A8(17.5,0) A9(20,0) A10(22.5,0) B1(0,1.5) B2(2.5,1.5) B3(5,1.5) B4(7.5,1.5) B5(10,1.5) B6(12.5,1.5) B7(15,1.5) B8(17.5,1.5) B9(20,1.5) B10(22.5,1.5) BG1(0,3) BG2(2.5,3) BG3(5,3) BG4(7.5,3) BG5(10,3) BG6(12.5,3) BG7(15,3) BG8(17.5,3) BG9(20,3) BG10(22.5,3) C1(0,4.5) C2(2.5,4.5) C3(5,4.5) C4(7.5,4.5) C5(10,4.5) C6(12.5,4.5) C7(15,4.5) C8(17.5,4.5) C9(20,4.5) C10(22.5,4.5) D1(0,6) D2(2.5,6) D3(5,6) D4(7.5,6) D5(10,6) D6(12.5,6) D7(15,6) D8(17.5,6) D9(20,6) D10(22.5,6) DG1(0,7.5) DG2(2.5,7.5) DG3(5,7.5) DG4(7.5,7.5) DG5(10,7.5) DG6(12.5,7.5) DG7(15,7.5) DG8(17.5,7.5) DG9(20,7.5) DG10(22.5,7.5)
CPLRAD197D492H866LD24
  round 1.397 hole 0.889: N(5,0)
  rect 1.397x1.397 hole 0.889: P(0,0)
D2PAK
  rect 2.083x3.81 smd: 1(-2.54,-6.985) 3(2.54,-6.985)
  rect 11.43x8.89 smd: 4(0,4.445)
DO214AA
  rect 1.778x2.032 smd: A(2.311,0) C(-2.311,0)
L0805
  rect 1.143x1.27 smd: 1(-0.953,0) 2(0.953,0)
LED0603
  rect 0.965x0.762 smd: A(0.8,0) C(-0.8,0)
LSMSQ154H47
  custom 1.448x4.394 smd: 1(-1.829,0) 2(1.829,0)
LSMSQ583H339
  rect 2.007x3.505 smd: 1(-1.854,-5.956) 2(1.854,-5.956) 3(1.854,5.956) 4(-1.854,5.956)
MLP8_3_3X3_3
  rect 0.432x0.711 smd: 1(-0.975,-1.394) 2(-0.325,-1.394) 3(0.325,-1.394) 4(0.975,-1.394) 5(0.975,1.394) 6(0.325,1.394) 7(-0.325,1.394) 8(-0.975,1.394)
MSOP8
  rect 0.305x1.321 smd: 1(-0.975,-2.3) 2(-0.325,-2.3) 3(0.325,-2.3) 4(0.975,-2.3) 5(0.975,2.3) 6(0.325,2.3) 7(-0.325,2.3) 8(-0.975,2.3)
PG-TO263-3
  rect 1.346x4.597 smd: 1(-2.54,-5.779) 3(2.54,-5.779)
  rect 10.795x9.398 smd: 4(0,3.378)
R0402
  rect 0.889x0.813 smd: 1(-0.635,0) 2(0.635,0)
R0603
  rect 1.092x1.194 smd: 1(-0.851,0) 2(0.851,0)
R0805
  rect 1.295x1.397 smd: 1(-0.953,0) 2(0.953,0)
R2512
  rect 1.778x3.048 smd: 1(-2.794,0) 2(2.794,0)
R3637
  rect 2.946x1.676 smd: 1(-3.734,3.81) 3(3.734,3.81)
  rect 2.946x7.01 smd: 2(-3.734,-1.143) 4(3.734,-1.143)
RM10
  rect 0.305x1.321 smd: 1(-1,-2.171) 2(-0.5,-2.171) 3(0,-2.171) 4(0.5,-2.171) 5(1,-2.171) 6(1,2.171) 7(0.5,2.171) 8(0,2.171) 9(-0.5,2.171) 10(-1,2.171)
SC70_4
  rect 0.356x0.787 smd: 1(-0.65,-0.98) 3(0.65,0.98) 4(-0.65,0.98)
  rect 0.762x0.787 smd: 2(0.5,-0.98)
SMB
  rect 2.159x2.794 smd: A(2.223,0) C(-2.223,0)
SO8
  rect 0.61x2.184 smd: 1(-1.905,-2.54) 2(-0.635,-2.54) 3(0.635,-2.54) 4(1.905,-2.54) 5(1.905,2.54) 6(0.635,2.54) 7(-0.635,2.54) 8(-1.905,2.54)
SO8NB-PAD3_1X2_41
  rect 0.635x1.524 smd: 1(-1.905,-2.667) 2(-0.635,-2.667) 3(0.635,-2.667) 4(1.905,-2.667) 5(1.905,2.667) 6(0.635,2.667) 7(-0.635,2.667) 8(-1.905,2.667)
  rect 3.099x2.413 smd: PAD(0,0)
SO14
  rect 0.61x2.184 smd: 1(-3.81,-2.54) 2(-2.54,-2.54) 3(-1.27,-2.54) 4(0,-2.54) 5(1.27,-2.54) 6(2.54,-2.54) 7(3.81,-2.54) 8(3.81,2.54) 9(2.54,2.54) 10(1.27,2.54) 11(0,2.54) 12(-1.27,2.54) 13(-2.54,2.54) 14(-3.81,2.54)
SO14NB-2
  rect 0.635x1.829 smd: 1(-3.81,-2.591) 2(-2.54,-2.591) 3(-1.27,-2.591) 4(0,-2.591) 5(1.27,-2.591) 6(2.54,-2.591) 7(3.81,-2.591) 8(3.81,2.591) 9(2.54,2.591) 10(1.27,2.591) 11(0,2.591) 12(-1.27,2.591) 13(-2.54,2.591) 14(-3.81,2.591)
SO16
  rect 0.61x2.184 smd: 1(-4.445,-2.54) 2(-3.175,-2.54) 3(-1.905,-2.54) 4(-0.635,-2.54) 5(0.635,-2.54) 6(1.905,-2.54) 7(3.175,-2.54) 8(4.445,-2.54) 9(4.445,2.54) 10(3.175,2.54) 11(1.905,2.54) 12(0.635,2.54) 13(-0.635,2.54) 14(-1.905,2.54) 15(-3.175,2.54) 16(-4.445,2.54)
SO16WB
  rect 0.635x1.727 smd: 1(-4.445,-4.801) 2(-3.175,-4.801) 3(-1.905,-4.801) 4(-0.635,-4.801) 5(0.635,-4.801) 6(1.905,-4.801) 7(3.175,-4.801) 8(4.445,-4.801) 9(4.445,4.801) 10(3.175,4.801) 11(1.905,4.801) 12(0.635,4.801) 13(-0.635,4.801) 14(-1.905,4.801) 15(-3.175,4.801) 16(-4.445,4.801)
SO28WB
  rect 0.635x1.727 smd: 1(-8.255,-4.788) 2(-6.985,-4.788) 3(-5.715,-4.788) 4(-4.445,-4.788) 5(-3.175,-4.788) 6(-1.905,-4.788) 7(-0.635,-4.788) 8(0.635,-4.788) 9(1.905,-4.788) 10(3.175,-4.788) 11(4.445,-4.788) 12(5.715,-4.788) 13(6.985,-4.788) 14(8.255,-4.788) 15(8.255,4.788) 16(6.985,4.788) 17(5.715,4.788) 18(4.445,4.788) 19(3.175,4.788) 20(1.905,4.788) 21(0.635,4.788) 22(-0.635,4.788) 23(-1.905,4.788) 24(-3.175,4.788) 25(-4.445,4.788) 26(-5.715,4.788) 27(-6.985,4.788) 28(-8.255,4.788)
SOD123-2
  rect 0.914x1.219 smd: A(1.638,0) C(-1.638,0)
SOD123-3
  rect 1.194x0.711 smd: A(1.847,0) C(-1.847,0)
SOT23
  rect 1.016x1.397 smd: 1(-0.94,-1.118) 2(0.94,-1.118) 3(0,1.118)
SOT23-M3
  rect 0.787x0.889 smd: 1(-0.94,-1.003) 2(0.94,-1.003) 3(0,1.003)
SOT23_6-2
  rect 0.711x0.991 smd: 1(-0.95,-1.2) 2(0,-1.2) 3(0.95,-1.2) 4(0.95,1.2) 5(0,1.2) 6(-0.95,1.2)
SWB3S1000
  rect 1.524x1.27 smd: 1(3.937,-2.286) 2(-3.937,-2.286) 3(3.937,2.286) 4(-3.937,2.286)
SWTHSQ315H555
  rect 1.397x1.397 hole 0.889: 1(0,0)
  round 1.397 hole 0.889: 2(2.5,0) 3(5,0) 4(0,6) 5(2.5,6) 6(5,6)
TPC50D30
  round 1.27 hole 0.762: 1(0,0)
TSOT23_6
  rect 0.61x1.219 smd: 1(-0.95,-1.31) 2(0,-1.31) 3(0.95,-1.31) 4(0.95,1.31) 5(0,1.31) 6(-0.95,1.31)
unnamed#2
  round 3.937 hole 2.667 unplated: (0,0)
unnamed#3
  round 1.016 smd: (0,0)

## Nets
2V5_REF: C14.1(N1) C17.1(N1) C65.1(N1) R59.1(N1) R60.1(N1) R71.2(N2) R72.2(N2) R73.2(N2) U2.3(VREF2) U2.7(VREF1) U3.3(VREF2) U3.7(VREF1) U8.5(VOUT_SENSE) U8.6(VOUT_FORCE)
5V0: A1.4(V+) A5.4(VCC) A6.4(VCC) A7.4(VCC) C1.2(N2) C15.2(N2) C18.2(N2) C33.2(N2) C34.2(N2) C35.1(N1) C40.1(N1) C42.1(N1) C43.1(N1) C44.1(N1) C57.2(N2) C72.1(N1) C73.1(N1) C74.1(N1) C75.1(N1) C76.1(N1) C77.1(N1) C78.1(N1) C79.1(N1) C80.1(N1) C81.1(N1) C82.1(N1) C83.1(N1) C84.1(N1) C85.1(N1) C86.1(N1) DS3.A(P) E3.2(N2) Q1.2(S) R10.1(N1) R15.1(N1) R53.1(N1) R54.1(N1) R55.1(N1) R74.1(N1) R78.1(N1) R81.1(N1) R92.1(N1) R97.1(N1) R101.1(N1) R102.1(N1) U2.6(V+) U3.6(V+) U4.5(OE) U4.16(VDD) U8.3(ENABLE) U8.4(VIN) U9.2(VDD1_1) U9.7(VDD1_2) U12.14(VDD2) U13.14(VDD2) U14.14(VDD2) U15.1(VDD1_1) U15.6(RCSEL) U15.7(VDD1_2) U16.1(VDD1_1) U16.6(RCSEL) U16.7(VDD1_2) U17.1(VDD1_1) U17.6(RCSEL) U17.7(VDD1_2)
5V0_ISO_A: C69.1(N1) E4.2(N2) R125.2(N2) R127.2(N2) U12.1(VDD1)
5V0_ISO_B: C70.1(N1) E5.2(N2) R122.2(N2) R124.2(N2) U13.1(VDD1)
5V0_ISO_T: C71.1(N1) E6.2(N2) R123.2(N2) R126.2(N2) U14.1(VDD1)
7V0: A2.8(+VS) A3.8(+VS) A4.8(+VS) C27.2(N2) C29.2(N2) C31.2(N2) C55.1(N1) R95.1(N1) U10.1(VOUT) U11.1(FC) U11.8(V+)
15V0: C7.1(N1) C23.2(N2) C45.1(N1) C47.1(N1) C52.1(N1) C64.P(N1) C99.1(N1) C100.1(N1) C101.2(N2) D1.A(P) D2.A(P) D3.A(P) D11.C(N) D15.A(P) E1.1(N1) R16.1(N1) R76.1(N1) R105.2(N2) U1.1(VCC) U5.3(V+) U9.10(VDDB) U10.5(EN_UVLO) U10.8(VIN) U18.1(VCC)
-7V0: A2.3(-VS) A2.6(WR_N) A3.3(-VS) A3.6(WR_N) A4.3(-VS) A4.6(WR_N) C28.2(N2) C30.2(N2) C32.2(N2) E2.2(N2)
AGND: A1.11(V-) A2.2(DGND) A3.2(DGND) A4.2(DGND) A5.2(GND) A6.2(GND) A7.2(GND) A8.2(GND) A8.6(PGND) C1.1(N1) C2.2(N2) C4.1(N1) C7.2(N2) C8.1(N1) C12.N(N2) C13.2(N2) C14.2(N2) C15.1(N1) C16.2(N2) C17.2(N2) C18.1(N1) C19.2(N2) C20.2(N2) C21.2(N2) C22.2(N2) C23.1(N1) C27.1(N1) C28.1(N1) C29.1(N1) C30.1(N1) C31.1(N1) C32.1(N1) C33.1(N1) C34.1(N1) C35.2(N2) C37.2(N2) C38.2(N2) C39.2(N2) C40.2(N2) C42.2(N2) C43.2(N2) C44.2(N2) C45.2(N2) C46.2(N2) C47.2(N2) C48.2(N2) C52.2(N2) C54.2(N2) C55.2(N2) C56.2(N2) C57.1(N1) C58.2(N2) C59.1(N1) C60.2(N2) C61.1(N1) C64.N(N2) C65.2(N2) C72.2(N2) C73.2(N2) C74.2(N2) C75.2(N2) C76.2(N2) C77.2(N2) C78.2(N2) C79.2(N2) C80.2(N2) C81.2(N2) C82.2(N2) C83.2(N2) C84.2(N2) C85.2(N2) C86.2(N2) C99.2(N2) C100.2(N2) C101.1(N1) C103.N(N2) CR2.A(P) D10.A(P) L2.2(N2) P2.BG1(N1) P2.BG2(N2) P2.BG3(N3) P2.BG4(N4) P2.BG5(N5) P2.BG6(N6) P2.BG7(N7) P2.BG8(N8) P2.BG9(N9) P2.BG10(N10) P2.DG1(N1) P2.DG2(N2) P2.DG3(N3) P2.DG4(N4) P2.DG5(N5) P2.DG6(N6) P2.DG7(N7) P2.DG8(N8) P2.DG9(N9) P2.DG10(N10) P4.2(N2) P5.2(N2) P5.3(N3) Q10.2(S) Q11.2(S) Q12.2(S) Q14.2(S) R1.2(N2) R7.2(N2) R12.2(N2) R14.1(N1) R17.2(N2) R21.2(N2) R24.2(N2) R40.2(N2) R42.2(N2) R44.2(N2) R46.2(N2) R61.1(N1) R62.2(N2) R63.2(N2) R64.2(N2) R65.2(N2) R66.2(N2) R67.2(N2) R68.2(N2) R69.2(N2) R70.2(N2) R75.2(N2) R77.2(N2) R82.2(N2) R83.2(N2) R88.2(N2) R90.2(N2) R91.2(N2) R93.2(N2) R96.2(N2) R99.2(N2) R103.1(N1) R104.2(N2) R109.2(N2) R110.2(N2) S1.1(N2) S1.2(N3) S2.3(C1) S2.4(C2) TP2.1(N1) TP4.1(N1) U1.12(VSS) U2.2(GND) U2.4(RANGE) U3.2(GND) U3.4(RANGE) U4.8(VSS) U5.8(IN-) U5.9(IN+) U5.12(GND) U6.6(GND) U7.2(GND) U8.1(GND_FORCE) U8.2(GND_SENSE) U9.1(GND1_1) U9.4(GND1_2) U9.8(GND1_3) U9.11(GNDB) U10.3(GND1) U10.6(GND2) U10.PAD U11.3(GND) U11.6(LV) U12.9(GND2_1) U12.16(GND2_2) U13.9(GND2_1) U13.16(GND2_2) U14.9(GND2_1) U14.16(GND2_2) U15.2(GND1_1) U15.8(GND1_2) U16.2(GND1_1) U16.8(GND1_2) U17.2(GND1_1) U17.8(GND1_2) U18.4(COM)
AGND_ISO_A: C69.2(N2) C87.2(N2) C90.2(N2) C93.2(N2) C96.2(N2) R2.3(N3) R117.1(N1) U2.1(-IN) U12.8(GND1) U15.9(GNDISO_1) U15.15(GNDISO_2)
AGND_ISO_B: C70.2(N2) C88.2(N2) C91.2(N2) C94.2(N2) C97.2(N2) R3.3(N3) R119.1(N1) U3.1(-IN) U13.8(GND1) U16.9(GNDISO_1) U16.15(GNDISO_2)
AGND_ISO_T: C71.2(N2) C89.2(N2) C92.2(N2) C95.2(N2) C98.2(N2) R1.1(N1) R23.2(N2) R121.1(N1) U14.8(GND1) U17.9(GNDISO_1) U17.15(GNDISO_2)
VBUS: A1.8(OUT) C3.2(N2) P2.C10(N10) P2.D10(N10) R18.2(N2) TP19.1(N1)
VBUS_HALF_REF: R39.2(N2) R40.1(N1) U5.4(IN-) U5.6(IN-) U5.10(IN-)
VBUS_ISENSE: A1.7(OUT) C5.2(N2) R20.1(N1) R58.1(N1) TP1.1(N1)
VIN: D12.A(P) P4.1(N1) Q8.4(D)
A_G0: R125.1(N1) U12.5(NC2)
A_G1: R127.1(N1) U12.6(NC3)
B_G0: R122.1(N1) U13.5(NC2)
B_G1: R124.1(N1) U13.6(NC3)
BEMF_A: P2.A4(N4) R50.2(N2) R53.2(N2) TP9.1(N1) U5.1(OUT)
BEMF_B: P2.D5(N5) R51.2(N2) R54.2(N2) TP17.1(N1) U5.2(OUT)
BEMF_C: P2.B4(N4) R52.2(N2) R55.2(N2) TP13.1(N1) U5.13(OUT)
CS: A8.9(CS) R111.2(N2)
DC_BUS_EXT: C12.P(N1) C13.1(N1) C49.2(N2) C50.2(N2) C103.P(N1) Q2.4(D) Q4.4(D) Q6.4(D) Q9.3(S) Q17.4(D) R11.1(N1) R39.1(N1) R79.1(N1) R87.2(N2) U9.14(GNDISO)
GATE_AH: D4.C(N) R25.1(N1) U1.27(HO1)
GATE_AL: D5.C(N) R26.1(N1) U1.16(LO1)
GATE_BH: D6.C(N) R30.1(N1) U1.23(HO2)
GATE_BL: D7.C(N) R31.1(N1) U1.15(LO2)
GATE_CH: D8.C(N) R35.1(N1) U1.19(HO3)
GATE_CL: D9.C(N) R36.1(N1) U1.14(LO3)
GATE_DH: D13.C(N) R112.1(N1) U18.7(HO)
GATE_DL: D14.C(N) R113.1(N1) U18.5(LO)
GPI2: P2.D4(N4)
GPI3: P2.C6(N6) U12.11(MDAT)
GPI4: P2.D6(N6) U13.11(MDAT)
GPI5: P2.C7(N7) U14.11(MDAT)
GPO1: A2.5(A1) A3.5(A1) A4.5(A1) P2.C1(N1) R62.1(N1) R63.1(N1) R64.1(N1)
GPO2: A2.4(A0) A3.4(A0) A4.4(A0) P2.D1(N1) R65.1(N1) R66.1(N1) R67.1(N1)
GPO3: P2.C2(N2) R100.1(N1)
GPO4: P2.D2(N2) U9.6(VIB)
GPO5: P2.C3(N3) U12.13(MCLKIN)
GPO6: P2.A5(N5) U13.13(MCLKIN)
GPO7: P2.B5(N5) U14.13(MCLKIN)
GPO8: P2.A6(N6) U18.2(HIN)
GPO9: P2.B6(N6) U18.3(LIN_N)
GPO10: P2.A7(N7)
GPO11: P2.B7(N7)
IA: A2.7(OUT) P2.A9(N9) P2.B9(N9) TP14.1(N1)
IA_IN: R2.1(N1) R116.1(N1) U2.8(+IN)
IA_X20: C16.1(N1) R29.2(N2) R56.1(N1) TP3.1(N1)
IB: A3.7(OUT) P2.A10(N10) P2.B10(N10) TP15.1(N1)
IB_IN: R3.1(N1) R118.1(N1) U3.8(+IN)
IB_X20: C19.1(N1) R34.2(N2) R57.1(N1) TP5.1(N1)
IT: A4.7(OUT) P2.C9(N9) P2.D9(N9) TP18.1(N1)
IT_IN: R1.3(N3) R22.2(N2) R120.1(N1)
M_FAULT: P2.C5(N5) R8.2(N2) R15.2(N2) U1.8(FAULT_N)
MOTOR_U: C9.2(N2) P1.1(N1) R2.4(N4) R41.1(N1) U1.26(VS1)
MOTOR_V: C10.2(N2) P1.2(N2) R3.4(N4) R43.1(N1) U1.22(VS2)
MOTOR_W: C11.2(N2) P1.3(N3) Q6.3(S) Q7.4(D) R37.2(N2) R45.1(N1) U1.18(VS3)
MOTOR_X: P5.1(N1) Q17.3(S) Q18.4(D) R114.2(N2)
OVC_CT: P2.C4(N4) R5.1(N1) U4.13(1Q) U9.5(VIA)
OVC_GATE: R86.1(N1) U9.16(VOA)
OVC_OUT: R80.1(N1) R88.1(N1) U6.5(OUT)
OVC_VISO: C49.1(N1) C50.1(N1) U9.15(VISO)
PWM_AH: P2.A1(N1) TP6.1(N1) U1.2(HIN1_N)
PWM_AL: P2.B1(N1) TP10.1(N1) U1.5(LIN1_N)
PWM_BH: P2.A2(N2) TP7.1(N1) U1.3(HIN2_N)
PWM_BL: P2.B2(N2) TP11.1(N1) U1.6(LIN2_N)
PWM_CH: P2.A3(N3) TP8.1(N1) U1.4(HIN3_N)
PWM_CL: P2.B3(N3) TP12.1(N1) U1.7(LIN3_N)
PWM_EN: P2.D3(N3) R9.1(N1) TP16.1(N1) U1.10(EN)
SDSN: A8.1(SDSN) A8.10(IN) C61.2(N2) Q15.2(E) R107.1(N1)
T_G0: R123.1(N1) U14.5(NC2)
T_G1: R126.1(N1) U14.6(NC3)
UNNAMED_2_ADCMP35X_I95_OUT: A5.3(OUT) DS1.C(N)
UNNAMED_2_ADCMP35X_I95_VIN: A5.1(VIN) R74.2(N2) R75.1(N1)
UNNAMED_2_ADCMP35X_I109_OUT: A6.3(OUT) DS2.C(N)
UNNAMED_2_ADCMP35X_I109_VIN: A6.1(VIN) R76.2(N2) R77.1(N1)
UNNAMED_2_ADCMP35X_I126_OUT: A7.3(OUT) DS6.C(N)
UNNAMED_2_ADCMP35X_I126_VIN: A7.1(VIN) R79.2(N2) R99.1(N1)
UNNAMED_2_DIOLED_I105_P: DS2.A(P) R101.2(N2)
UNNAMED_2_DIOLED_I116_P: DS1.A(P) R78.2(N2)
UNNAMED_2_DIOLED_I121_P: DS6.A(P) R102.2(N2)
UNNAMED_2_DIOLED_I149_N: DS5.C(N) Q11.3(D)
UNNAMED_2_DIOLED_I149_P: DS5.A(P) R10.2(N2)
UNNAMED_2_DIOLED_I165_N: DS3.C(N) R6.1(N1)
UNNAMED_2_DIOLED_I166_N: DS4.C(N) R7.1(N1)
UNNAMED_2_DIOLED_I166_P: DS4.A(P) Q1.3(D)
UNNAMED_2_RES_I148_N1: Q1.1(G) R8.1(N1)
UNNAMED_2_RES_I162_N2: Q10.1(G) R5.2(N2)
UNNAMED_2_RES_I167_N2: Q10.3(D) R6.2(N2)
UNNAMED_2_RES_I193_N2: Q11.1(G) R9.2(N2)
UNNAMED_3_AD713N_I24_INV: A1.2(INV) C6.1(N1) R19.2(N2) R23.1(N1)
UNNAMED_3_AD713N_I24_NINV: A1.3(NINV) C8.2(N2) R21.1(N1) R22.1(N1)
UNNAMED_3_AD713N_I24_OUT: A1.1(OUT) A1.5(NINV) C6.2(N2) R19.1(N1) U1.9(ITRIP)
UNNAMED_3_AD713N_I42_INV: A1.6(INV) C5.1(N1) R20.2(N2) R24.1(N1)
UNNAMED_3_AD713N_I133_INV: A1.9(INV) C3.1(N1) R14.2(N2) R18.1(N1)
UNNAMED_3_AD713N_I133_NINV: A1.10(NINV) C4.2(N2) R13.2(N2) R17.1(N1)
UNNAMED_3_AD8207_I8_OUT: R34.1(N1) U3.5(OUT)
UNNAMED_3_AD8207_I108_OUT: R29.1(N1) U2.5(OUT)
UNNAMED_3_CAP_I16_N1: C2.1(N1) R16.2(N2) U1.11(RCIN)
UNNAMED_3_CAP_I19_N1: C9.1(N1) D1.C(N) U1.28(VB1)
UNNAMED_3_CAP_I22_N1: C10.1(N1) D2.C(N) U1.24(VB2)
UNNAMED_3_CAP_I23_N1: C11.1(N1) D3.C(N) U1.20(VB3)
UNNAMED_3_CAP_I247_N1: C102.1(N1) U18.6(VS)
UNNAMED_3_CAP_I247_N2: C102.2(N2) D15.C(N) U18.8(VB)
UNNAMED_3_DIO_I49_P: D5.A(P) Q3.1(G) R26.2(N2) R28.1(N1)
UNNAMED_3_DIO_I55_P: D4.A(P) Q2.1(G) R25.2(N2) R27.1(N1)
UNNAMED_3_DIO_I59_P: D6.A(P) Q4.1(G) R30.2(N2) R32.1(N1)
UNNAMED_3_DIO_I64_P: D7.A(P) Q5.1(G) R31.2(N2) R33.1(N1)
UNNAMED_3_DIO_I67_P: D9.A(P) Q7.1(G) R36.2(N2) R38.1(N1)
UNNAMED_3_DIO_I73_P: D8.A(P) Q6.1(G) R35.2(N2) R37.1(N1)
UNNAMED_3_DIO_I236_P: D13.A(P) Q17.1(G) R112.2(N2) R114.1(N1)
UNNAMED_3_DIO_I240_P: D14.A(P) Q18.1(G) R113.2(N2) R115.1(N1)
UNNAMED_3_ICIRS2336D_I10_COM: Q3.3(S) Q5.3(S) Q7.3(S) Q18.3(S) R1.4(N4) R28.2(N2) R33.2(N2) R38.2(N2) R115.2(N2) U1.13(COM)
UNNAMED_3_RES_I53_N2: Q2.3(S) Q3.4(D) R2.2(N2) R27.2(N2)
UNNAMED_3_RES_I62_N2: Q4.3(S) Q5.4(D) R3.2(N2) R32.2(N2)
UNNAMED_3_RES_I150_N2: R11.2(N2) R12.1(N1) R13.1(N1)
UNNAMED_4_CAP_I42_N1: C20.1(N1) R41.2(N2) R42.1(N1) R47.1(N1)
UNNAMED_4_CAP_I48_N1: C21.1(N1) R43.2(N2) R44.1(N1) R48.1(N1)
UNNAMED_4_CAP_I57_N1: C22.1(N1) R45.2(N2) R46.1(N1) R49.1(N1)
UNNAMED_4_CMP04_I4_IN: R47.2(N2) R50.1(N1) U5.7(IN+)
UNNAMED_4_CMP04_I45_IN: R48.2(N2) R51.1(N1) U5.5(IN+)
UNNAMED_4_CMP04_I54_IN: R49.2(N2) R52.1(N1) U5.11(IN+)
UNNAMED_5_AD7401_I178_VIN: C66.1(N1) R116.2(N2) U12.2(VIN+)
UNNAMED_5_AD7401_I178_VIN_1: C66.2(N2) R117.2(N2) U12.3(VIN-)
UNNAMED_5_AD7401_I198_VIN: C67.1(N1) R118.2(N2) U13.2(VIN+)
UNNAMED_5_AD7401_I198_VIN_1: C67.2(N2) R119.2(N2) U13.3(VIN-)
UNNAMED_5_AD7401_I212_VIN: C68.2(N2) R121.2(N2) U14.3(VIN-)
UNNAMED_5_AD7401_I212_VIN_1: C68.1(N1) R120.2(N2) U14.2(VIN+)
UNNAMED_5_AD8251_I1_: A2.1(-IN) C24.2(N2) R59.2(N2)
UNNAMED_5_AD8251_I1__1: A2.10(+IN) C24.1(N1) R56.2(N2)
UNNAMED_5_AD8251_I1_REF: A2.9(REF) R68.1(N1) R71.1(N1)
UNNAMED_5_AD8251_I65_: A3.1(-IN) C25.2(N2) R60.2(N2)
UNNAMED_5_AD8251_I65__1: A3.10(+IN) C25.1(N1) R57.2(N2)
UNNAMED_5_AD8251_I65_REF: A3.9(REF) R69.1(N1) R72.1(N1)
UNNAMED_5_AD8251_I79_: A4.10(+IN) C26.1(N1) R58.2(N2)
UNNAMED_5_AD8251_I79__1: A4.1(-IN) C26.2(N2) R61.2(N2)
UNNAMED_5_AD8251_I79_REF: A4.9(REF) R70.1(N1) R73.1(N1)
UNNAMED_5_ADUM5000_I234_VISO1: C87.1(N1) C90.1(N1) C93.1(N1) C96.1(N1) E4.1(N1) U15.10(VISO_1) U15.13(VSEL) U15.16(VISO_2)
UNNAMED_5_ADUM5000_I254_VISO1: C88.1(N1) C91.1(N1) C94.1(N1) C97.1(N1) E5.1(N1) U16.10(VISO_1) U16.13(VSEL) U16.16(VISO_2)
UNNAMED_5_ADUM5000_I274_VISO1: C89.1(N1) C92.1(N1) C95.1(N1) C98.1(N1) E6.1(N1) U17.10(VISO_1) U17.13(VSEL) U17.16(VISO_2)
UNNAMED_6_AD8214_I34_: C36.2(N2) R84.2(N2) R85.1(N1) U6.2(+IN)
UNNAMED_6_AD8214_I34__1: R4.3(N3) U6.8(-IN)
UNNAMED_6_AD8214_I34_VREG: R85.2(N2) U6.3(VREG)
UNNAMED_6_AD8214_I34_VS: C36.1(N1) C37.1(N1) R4.1(N1) R84.1(N1) U6.1(VS)
UNNAMED_6_ADM660_I107_CAP: C51.2(N2) C53.2(N2) U11.4(CAP-)
UNNAMED_6_ADM660_I107_CAP_1: C51.1(N1) C53.1(N1) U11.2(CAP+)
UNNAMED_6_ADM660_I107_OUT: C54.1(N1) C56.1(N1) E2.1(N1) U11.5(OUT)
UNNAMED_6_ADP1621_I170_COMP: A8.3(COMP) C60.1(N1) C62.1(N1)
UNNAMED_6_ADP1621_I170_FB: A8.4(FB) R103.2(N2) R105.1(N1)
UNNAMED_6_ADP1621_I170_FREQ: A8.5(FREQ) R104.1(N1)
UNNAMED_6_ADP1621_I170_GATE: A8.7(GATE) Q16.4(G)
UNNAMED_6_ADP1621_I170_PIN: A8.8(PIN) C59.2(N2) R107.2(N2)
UNNAMED_6_ADP2301_I50_BST: C41.1(N1) U7.1(BST)
UNNAMED_6_ADP2301_I50_EN: R89.2(N2) R90.1(N1) U7.4(EN)
UNNAMED_6_ADP2301_I50_FB: R91.1(N1) R94.1(N1) U7.3(FB)
UNNAMED_6_ADP2301_I50_SW: C41.2(N2) D10.C(N) L1.1(N1) U7.6(SW)
UNNAMED_6_ADP2301_I50_VIN: C38.1(N1) C39.1(N1) E1.2(N2) R89.1(N1) U7.5(VIN)
UNNAMED_6_ADUM5230_I15_VADJ: R92.2(N2) R93.1(N1) U9.3(VADJ)
UNNAMED_6_CAP_I40_N1: C46.1(N1) C48.1(N1) E3.1(N1) L1.2(N2) R94.2(N2)
UNNAMED_6_CAP_I181_N2: C62.2(N2) R109.1(N1)
UNNAMED_6_CAP_I210_N1: C58.1(N1) D12.C(N) L2.1(N1) R106.1(N1) R108.1(N1)
UNNAMED_6_CAP_I212_N1: C63.1(N1) L2.3(N3) Q16.5(D1) Q16.6(D2) Q16.7(D3) Q16.8(D4)
UNNAMED_6_CAP_I212_N2: C63.2(N2) D11.A(P) L2.4(N4)
UNNAMED_6_DIOZNR_I26_N: CR1.C(N) Q8.3(S) R4.2(N2)
UNNAMED_6_DIOZNR_I26_P: CR1.A(P) Q8.1(G) R82.1(N1) R83.1(N1)
UNNAMED_6_DIOZNR_I223_N: CR2.C(N) Q15.1(B) R106.2(N2)
UNNAMED_6_ICHEF4044B_I103_1RN: Q12.3(D) R81.2(N2) S2.2(NO1) S2.5(NO2) U4.4(1R_N)
UNNAMED_6_ICHEF4044B_I103_1SN: Q14.3(D) R97.2(N2) S1.3(N5) S1.4(N4) U4.3(1S_N)
UNNAMED_6_RES4PKEL_I251_N4: Q9.4(D) R4.4(N4)
UNNAMED_6_RES_I134_N2: Q12.1(G) R80.2(N2)
UNNAMED_6_RES_I148_N2: R95.2(N2) R96.1(N1) U10.2(SENSE_ADJ)
UNNAMED_6_RES_I150_N2: Q9.1(G) R86.2(N2) R87.1(N1)
UNNAMED_6_RES_I168_N2: Q14.1(G) R100.2(N2)
UNNAMED_6_RES_I185_N1: Q16.1(S1) Q16.2(S2) Q16.3(S3) R110.1(N1) R111.1(N1)
UNNAMED_6_RES_I207_N2: Q15.3(C) R108.2(N2)

Pads without a net: A1 12 13 14; P2 A8 B8 C8 D7 D8; S2 1 6; U1 17 21 25; U4 1 2 6 7 9 10 11 12 14 15; U5 14; U6 4 7; U9 9 12 13; U10 4 7; U11 7; U12 4 7 10 12 15; U13 4 7 10 12 15; U14 4 7 10 12 15; U15 3 4 5 11 12 14; U16 3 4 5 11 12 14; U17 3 4 5 11 12 14

## Via types
v1: diameter 0.635, hole 0.305, TOP to BOTTOM, 625 vias

## Routing (per net, layer and track width the routed paths; a pad name or vN(x,y) marks a point on that pad's centre or on a via; arc(x,y) is an arc through that point)
2V5_REF: length 182.6
  TOP w0.635: 12.19,126.41 11.43,127.17 11.43,134.15 12.19,134.91 ; 12.19,126.41 11.43,125.64 11.43,123.69 12.21,122.91 C17.1 ; 12.19,126.41 U3.3 16.17,126.41 17.44,127.68 U3.7 ; C14.1 12.26,134.98 12.19,134.91 ; 17.78,139.74 17.7,139.74 16.43,138.47 U2.3 11.94,138.47 11.43,137.96 11.43,135.68 12.19,134.91 ; 17.78,139.74 U2.7 ; 17.78,139.74 17.15,140.38 17.15,144.49 v1(17.79,145.14)
  L4_SIGH w0.635: v1(17.79,145.14) 34.93,145.14 37.15,147.36 v1(95.89,147.36)
  L5_SIGV w0.635: v1(95.89,147.36) 95.01,147.36 94.57,146.92 94.57,140.33 98.33,136.57 98.33,134.31 v1(97.79,133.77) 98.55,133.77 99.19,133.14 99.19,130.98 99.7,130.47 99.7,129.45 100.33,128.82 v1(100.33,125.77) 100.33,124.75 98.93,123.36 v1(98.93,119.42)
  BOTTOM w0.635: C65.1 102.11,138.15 100.89,139.37 98.96,139.37 R59.1 98.68,139.14 98.68,134.66 v1(97.79,133.77) 96.9,133.77 96.84,133.71 R72.2 ; C65.1 102.87,138.47 U8.6 ; C65.1 103.19,138.53 103.82,139.17 U8.5 ; R71.2 v1(95.89,147.36) ; R60.1 v1(100.33,125.77) ; R73.2 v1(98.93,119.42)
5V0: length 462
  TOP w0.635: C35.1 121.29,145.58 ; 121.29,145.58 122.05,144.82 U4.16 ; 121.29,145.58 120.45,144.74 120.45,140.66 119.52,139.74 ; v1(40.64,106.4) C72.1 39.62,104.18 U12.14 ; 122.34,132.54 121.6,131.8 C33.2 ; 122.34,132.54 121.29,133.59 121.29,137.84 119.52,139.6 119.52,139.74 ; 122.34,132.54 R81.1 ; U2.6 18.1,138.47 v1(16.51,136.88) 16.51,135.3 C15.2 ; U9.7 82.87,90.15 83.88,91.16 C42.1 C44.1 85.76,88.94 85.22,88.39 v1(85.22,85.13) ; C33.2 120.69,129.58 120.37,129.26 R74.1 119.38,129.3 116.14,132.54 R97.1 ; C33.2 121.6,128.58 121.59,128.57 A5.4 121.54,127.65 121.54,127.09 121.91,126.72 123.61,126.72 R78.1 124.88,125.66 124.46,125.24 124.46,124.75 122.94,123.23 121.92,123.23 121.6,122.91 C34.2 121.6,121.28 121.59,121.26 A6.4 121.59,120.18 122.33,119.45 124.21,119.45 124.88,118.77 R101.1 124.88,116.57 124.55,116.25 122.56,116.25 121.91,115.6 121.91,115.28 C57.2 121.6,113.98 121.59,113.96 A7.4 121.59,112.88 122.35,112.12 123.66,112.12 124.88,110.9 R102.1 124.88,110.52 125.51,109.9 125.51,109.48 v1(126.05,108.94) ; U13.14 C73.1 v1(40.64,115.61) ; R15.1 107.21,137.72 107.31,137.62 v1(107.31,136.57) ; C18.2 16.19,123.99 v1(16.32,124.12) 16.32,124.88 17.84,126.41 U3.6 ; v1(26.04,136.57) 26.04,137.07 26.67,137.71 C1.2 26.99,138.47 27.94,139.42 A1.4 ; R10.1 v1(114.08,122.21) 114.08,123.18 114.13,123.23 DS3.A ; 119.52,139.74 U4.5 ; Q1.2 v1(112.06,112.13) ; U14.14 C74.1 v1(40.64,127.36) ; v1(73.98,85.45) R92.1 75.88,85.66 75.88,86.4 76.52,87.04 U9.2
  L4_SIGH w0.635: v1(127.89,86.27) 127.35,86.81 126.27,86.81 125.79,86.34 125.79,84.94 125.09,84.24 v1(124.71,84.24) 122.68,84.24 121.78,85.14 119.52,85.14 118.62,84.24 v1(107.7,84.24) v1(103.25,84.24) 86.11,84.24 v1(85.22,85.13) 83.85,86.5 75.98,86.5 74.93,85.45 v1(73.98,85.45) 73.98,86.21 72.52,87.67 41.59,87.67 v1(40.64,88.62) ; v1(16.51,136.88) 17.05,137.42 25.18,137.42 v1(26.04,136.57) ; v1(126.05,108.94) 123.41,111.58 112.62,111.58 v1(112.06,112.13) ; v1(40.64,127.36) 40.1,127.9 23.97,127.9 21.75,125.68 17.88,125.68 v1(16.32,124.12)
  L5_SIGV w0.635: v1(16.32,124.12) 13.65,126.79 13.65,134.03 v1(16.51,136.88) ; v1(101.54,132.44) 102.74,131.23 102.74,126.34 v1(103.63,125.45) 102.62,124.44 102.62,121.71 v1(103.63,120.69) 102.49,119.55 102.49,114.85 v1(103.63,113.71) 102.74,112.82 102.74,109.83 v1(103.63,108.94) 103.63,105.1 104.55,104.18 104.55,100.9 v1(105.09,100.36) 105.09,98.72 104.14,97.77 104.14,94.91 103.25,94.02 v1(103.25,84.24) ; v1(40.64,88.62) v1(40.64,106.4) 40.64,108.37 39.8,109.21 39.8,114.77 v1(40.64,115.61) 40.64,117.52 39.75,118.4 39.75,126.36 40.1,126.71 40.1,126.82 v1(40.64,127.36)
  BOTTOM w0.635: C81.1 107.31,108.94 107.95,108.31 U15.6 ; C81.1 107.62,109.56 107.94,109.56 107.95,109.58 U15.7 ; C81.1 107.06,109.51 105.66,109.51 C84.1 v1(103.63,108.94) ; v1(103.63,120.69) C85.1 105.41,121.01 C82.1 ; R54.1 127.32,87.04 127.25,86.97 127.89,86.34 v1(127.89,86.27) ; v1(103.63,125.45) C80.1 105.41,125.77 C77.1 108.27,125.77 108.59,125.45 U17.1 ; C82.1 107.31,120.69 107.95,120.06 109.5,120.06 ; C82.1 107.63,121.01 107.95,121.33 U16.7 112.14,121.33 113.03,122.21 v1(114.08,122.21) ; R55.1 107.63,85.77 107.7,85.7 v1(107.7,84.24) ; C83.1 107.31,132.44 107.95,131.8 U17.6 ; C83.1 105.41,132.76 C86.1 v1(101.54,132.44) ; C83.1 107.62,133.06 107.94,133.06 107.95,133.07 U17.7 110.86,133.07 111.12,133.34 111.12,135.04 109.6,136.57 v1(107.31,136.57) 107.31,137.76 104.77,140.31 U8.4 U8.3 104.77,144.51 C43.1 104.46,145.7 104.78,146.01 C40.1 105.89,147.36 106.21,147.68 E3.2 ; v1(124.71,84.24) 123.7,84.24 123.19,84.75 R53.1 ; v1(105.09,100.36) C78.1 105.41,102.28 C75.1 108.27,102.28 108.59,101.96 U15.1 ; v1(103.63,113.71) C79.1 105.6,114.21 107.12,114.21 C76.1 108.39,114.02 108.71,113.71 U16.1 110.05,113.71 110.7,113.06 111.14,113.06 v1(112.06,112.13)
